# Altium PCB PCB1.PcbDoc
Units mm, origin at the board's own origin, x right, y up, seen from the top; angles counter-clockwise.
Board outline 50.8 x 19 mm, 2 copper layers (Top Layer, Bottom Layer); 27 components, 28 nets, 119 pads, 28 vias.
Unrouted connection lines stored in the file: 1.
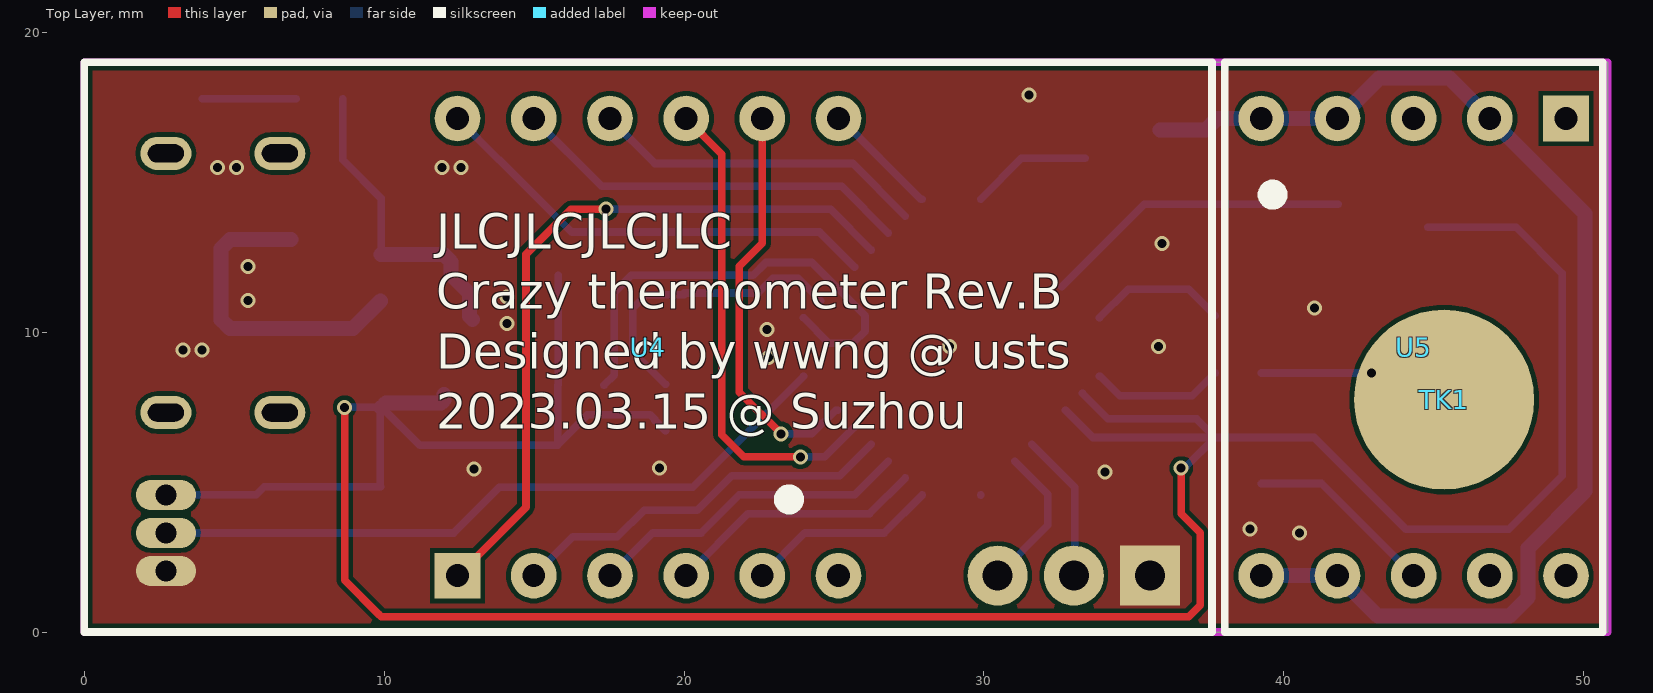
[diagram p0: Top Layer view]
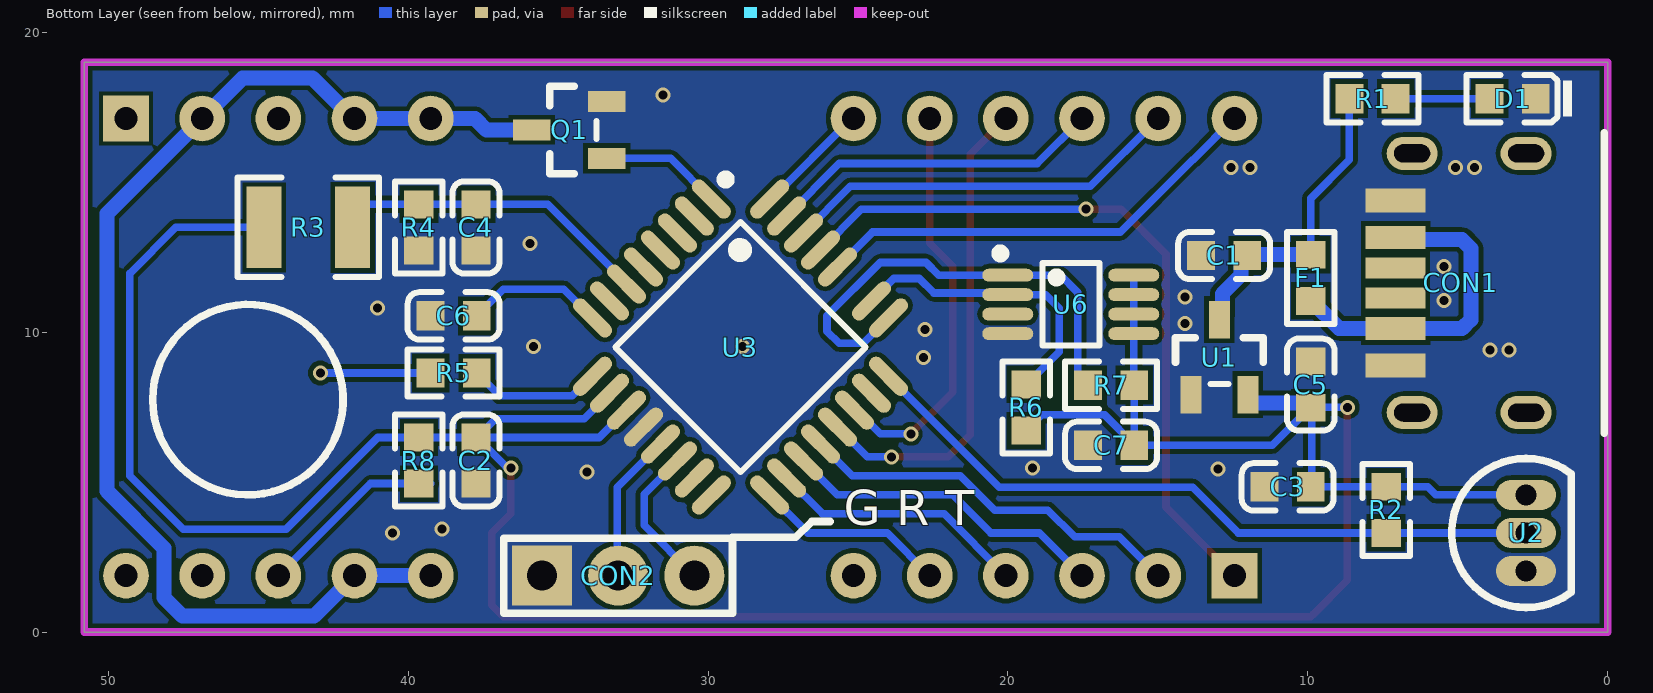
[diagram p1: Bottom Layer view, seen from below]
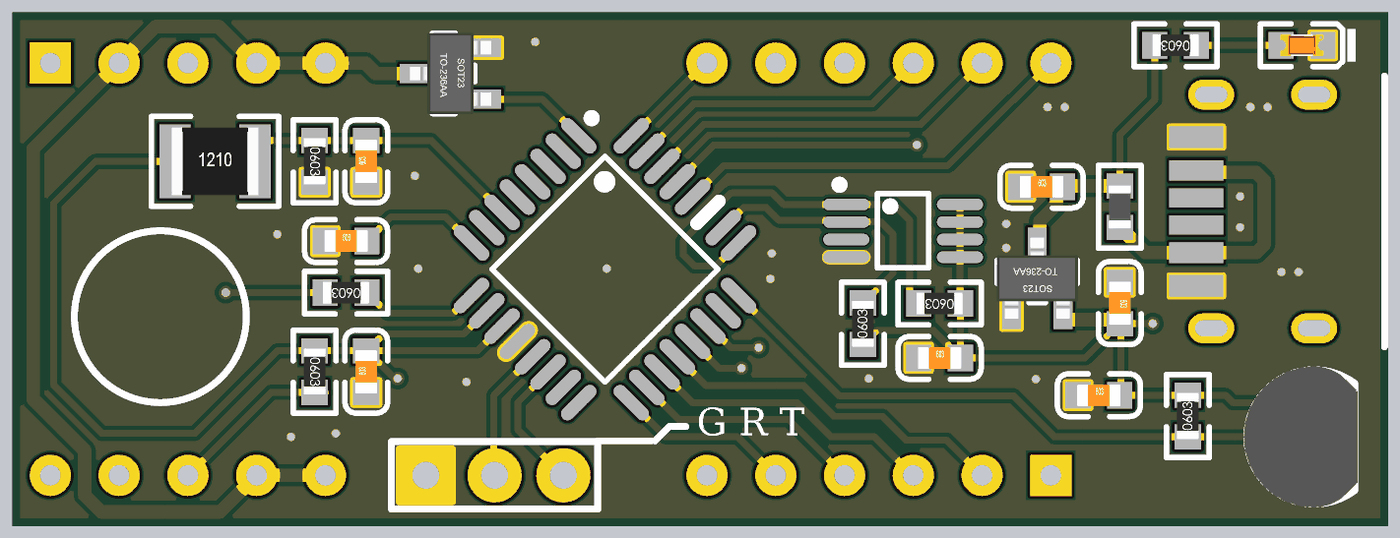
[diagram p2: 3D render of the assembled board from below, using the file's embedded part models]

## Layer stack, top to bottom
Top Solder: solder mask 0.0102, Solder Resist, Dk 3.5
Top Layer: signal copper 0.0356
Dielectric 1: dielectric 0.32, FR-4, Dk 4.8
Bottom Layer: signal copper 0.0356
Bottom Solder: solder mask 0.0102, Solder Resist, Dk 3.5

## Board outline
0,0 0,19 50.8,19 50.8,0

## Design rules (kind name [scope] priority, off if disabled: settings)
Clearance [All] p1: gap=0.152 ignorepadtopadclearanceinfootprint=FALSE
PolygonConnect [All] p1: connectstyle=Direct reliefconductorwidth=0.254 reliefentries=4 polygonreliefangle="90 Angle" airgapwidth=0.254
RoutingVias [All] p1: holewidth=0.711 width=1.27 viastyle="Through Hole" minholewidth=0.711 minwidth=1.27 maxholewidth=0.711 maxwidth=1.27
SolderMaskExpansion [All] p1: expansion=0.102 istentingtop=FALSE
Width [All] p1: maxlimit=1 minlimit=0.152 preferedwidth=0.254
30 further rules are at their usual default settings.

## Classes and differential pairs
component class Sheet1: C1 C2 C3 C4 C5 C6 C7 CON1 CON2 D1 F1 Q1 R4 R5 R6 R7 R8 TK1 U1 U2 U3 U4 U5 U6

## Components (designator, comment, footprint, x,y, rotation, side; value= is the part's Value field where it differs from the comment)
C1 "1uF" 0603_C 12.794,12.553 r180 bottom
C2 "1uF" 0603_C 37.736,5.715 r90 bottom
C3 "0.1uF" 0603_C 10.676,4.842 r180 bottom
C4 "0.1uF" 0603_C 37.736,13.488 r90 bottom
C5 "0.1uF" 0603_C 9.906,8.247 r270 bottom
C6 "0.01uF" 0603_C 38.481,10.541 r180 bottom
C7 "0.1uF" 0603_C 16.561,6.223 r180 bottom
CON1 "USB Type-C" "TYPE-C 6P" 0.127,11.636 r90 bottom
CON2 "HDR1x3" HDR1X3 32.995,1.88 r180 bottom
D1 "LED" 0603_LED_S1 3.175,17.78 r0 bottom
F1 "6V/0.5A" 0603_L 9.906,11.808 r90 bottom
Q1 "AO3416" SOT-23(SOT-23-3) 34.624,16.739 r180 bottom
R1 "10K" 0603_R 7.847,17.78 r0 bottom
R2 "10K" 0603_R 7.391,4.072 r90 bottom
R3 "GT36516" 1210_R 43.324,13.488 r180 bottom
R4 "10K" 0603_R 39.642,13.488 r270 bottom
R5 "1K" 0603_R 38.481,8.636 r0 bottom
R6 "10K" 0603_R 19.396,7.485 r90 bottom
R7 "10K" 0603_R 16.561,8.23 r0 bottom
R8 "1K" 0603_R 39.642,5.715 r270 bottom
TK1 "Touch Key" TOUCHKEYD6 45.339,7.747 r0 top
U1 "SC662K-3.3V" SOT-23(SOT-23-3) 12.954,9.164 r270 bottom
U2 "DS18B20" TO-92(TO-92-3) 2.727,3.302 r90 bottom
U3 "STC8H4K64TL-45I-LQFP32" LQFP-32_7X7X08P 28.917,9.5 r315 bottom
U4 "数码管 3P 共阴" "0.56寸 3位" 18.8,9.5 r0 top locked
U5 "数码管 1P 共阳" "0.56寸 1位" 44.323,9.5 r180 top locked
U6 "LM75BDP" MSOP-8 17.907,10.922 r270 bottom

## Footprints (in the part's own frame and the unit in brackets; to place one, negate y for a bottom-side part, rotate by r counter-clockwise, add the part's x,y. Pads: shape width x height; smd on the part's side, far side on the other; paste and mask are expansions set on the pad)
"0.56寸 1位" [mil] "数码管"
  rect 60x60 hole 30: 1(-200,-300)
  round 60 hole 30: 2(-100,-300) 3(0,300) 3(0,-300) 4(100,-300) 5(200,-300) 6(200,300) 7(100,300) 9(-100,300) 10(-200,300)
  silkscreen extent -248,-374 248,374, body extent -248,-374 248,374, height 315
"0.56寸 3位" [mil] "数码管"
  rect 60x60 hole 30: 1(-250,-300)
  round 60 hole 30: 2(-150,-300) 3(-50,-300) 4(50,-300) 5(150,-300) 6(250,-300) 7(250,300) 8(150,300) 9(50,300) 10(-50,300) 11(-150,300) 12(-250,300)
  silkscreen extent -740,-374 740,374, body extent -744,-374 744,374, height 315
0603_C [mm]
  rect 0.93x0.98 smd: 1(-0.77,0) 2(0.77,0)
  silkscreen extent -1.53,-0.79 1.54,0.79, body extent -0.8,-0.4 0.8,0.4, height 0.3
0603_L [mm]
  rect 0.93x0.98 smd: 1(-0.77,0) 2(0.77,0)
  silkscreen extent -1.53,-0.79 1.54,0.79, body extent -0.8,-0.41 0.8,0.41, height 0.46
0603_LED_S1 [mm]
  rect 0.93x0.98 smd: A(0.77,0) K(-0.77,0)
  silkscreen extent -1.97,-0.79 1.54,0.79, body extent -0.8,-0.4 0.8,0.4, height 0.6
0603_R [mm]
  rect 0.93x0.98 smd: 1(-0.77,0) 2(0.77,0)
  silkscreen extent -1.53,-0.79 1.54,0.79, body extent -0.85,-0.4 0.85,0.4, height 0.56
1210_R [mm]
  rect 1.16x2.72 smd: 1(-1.475,0) 2(1.475,0)
  silkscreen extent -2.35,-1.66 2.36,1.66, body extent -1.6,-1.25 1.6,1.25, height 0.6
HDR1X3 [mm]
  rect 2x2 hole 1: 1(-2.54,0)
  round 2 hole 1: 2(0,0) 3(2.54,0)
  silkscreen extent -3.81,-1.25 3.81,1.25
LQFP-32_7X7X08P [mm]
  oval 0.48x1.65 smd: 1(-2.8,-4.175) 2(-2,-4.175) 3(-1.2,-4.175) 4(-0.4,-4.175) 5(0.4,-4.175) 6(1.2,-4.175) 7(2,-4.175) 8(2.8,-4.175) 17(2.8,4.175) 18(2,4.175) 19(1.2,4.175) 20(0.4,4.175) 21(-0.4,4.175) 22(-1.2,4.175) 23(-2,4.175) 24(-2.8,4.175)
  oval 1.65x0.48 smd: 9(4.175,-2.8) 10(4.175,-2) 11(4.175,-1.2) 12(4.175,-0.4) 13(4.175,0.4) 14(4.175,1.2) 15(4.175,2) 16(4.175,2.8) 25(-4.175,2.8) 26(-4.175,2) 28(-4.175,0.4) 29(-4.175,-0.4) 30(-4.175,-1.2) 31(-4.175,-2) 32(-4.175,-2.8)
  oval 1.65x0.48 on Bottom Overlay: 27(-4.175,1.2)
  silkscreen extent -3.75,-4.45 2.95,2.95
MSOP-8 [mm]
  oval 0.43x1.7 smd mask+0.051: 1(-0.975,-2.1) 2(-0.325,-2.1) 3(0.325,-2.1) 4(0.975,-2.1) 5(0.975,2.1) 6(0.325,2.1) 7(-0.325,2.1) 8(-0.975,2.1)
  silkscreen extent -1.85,-2.5 1.38,0.95
SOT-23(SOT-23-3) [mm]
  rect 1.25x0.7 smd: 1(1.25,-0.95) 2(1.25,0.95) 3(-1.25,0)
  silkscreen extent -0.65,-1.46 0.9,1.46, body extent -1.5,-1.5 1.5,1.5, height 1.3
TO-92(TO-92-3) [mm]
  oval 1x2 hole 0.7 mask+0.051: 1(-1.27,0) 2(0,0) 3(1.27,0)
  silkscreen extent -2.48,-1.5 2.48,2.48, body extent -2.61,-1.6 2.61,2.6, height 8
TOUCHKEYD6 [mm]
  round 6 smd: 1(0,0)
"TYPE-C 6P" [mm]
  oval 1.1x1.7 hole 0.6 slot 1.2 at 90 deg: 0(-4.32,6.4) 0(4.32,6.4) 2(-4.32,2.6) 2(4.32,2.6)
  rect 0.7x2 smd: A5(-0.5,6.95) B5(0.5,6.95)
  rect 0.76x2 smd: A9(1.52,6.95) B9(-1.52,6.95)
  rect 0.8x2 smd: A12(2.75,6.95) B12(-2.75,6.95)
  silkscreen extent -5,0 5,0, body extent -4.47,0 4.47,6.8, height 3.2

## Part data
C1 C2 C3 C4 C5 C6 C7: library part "0603 100nF (104) 10% 50V", "贴片电容", Package=0603, SuppliersPartNumber=C14663, ComponentLink1Description=供应商链接, ComponentLink1URL=http://www.szlcsc.com/product/details_15331.html, Supplier=LC
D1: library part Diode, "二极管", Package=SMA(DO-214AC), SuppliersPartNumber=C95872, ComponentLink1Description=供应商链接, ComponentLink1URL=http://www.szlcsc.com/product/details_2841.html, Notepad="1N4007 4007 编号C2464 已经停售, 使用新物料编号C95872", Supplier=LC
F1 R1 R2 R3 R4 R5 R6 R7 R8: library part RES, "Resistor"
Q1: "N-Channel Power MOSFET", ComponentLink1Description="Manufacturer Link", ComponentLink1URL=http://www.irf.com/, DatasheetVersion=PD-9.390D, LatestRevisionDate=17-Jul-2002, LatestRevisionNote="Re-released for DXP Platform.", Note="Pin 4 not drawn and electrically connected to Pin 2.", PackageDescription="TO, Thru-Hole, Vertical, Heatsink Mounted; 3 In-Line Leads; Pitch 2.54 mm", PackageReference=TO-220AB, PackageVersion=Feb-1997, Published=8-Jun-2000, Publisher="Altium Limited"
U1: library part "AMS1117 3.3V"
U4: library part "数码管 3P"
U5: library part "数码管 1P"

## Via types
v1: diameter 0.5, hole 0.3, Top Layer to Bottom Layer, tented both sides, 28 vias

## Nets (pads, with @x,y where several pads share a name; then routed paths per layer and width w, separated by ;. In a path a pad name is that pad's centre, name@x,y a point inside that pad or via, vN(x,y) a via of type N, cw(c..) or ccw(c..) an arc to the next point about the centre after c; other vN are vias at no path point)
+3.3V: C2.2 C3.2 C5.2 C7.2 R2.2 R3.1 R6.1 R7.1 R8.1 U1.2 U2.3 U3.10 U3.11 U6.5 U6.6 U6.7 U6.8 | length 107
  Top Layer w0.254: v1(8.687,7.493) 8.687,1.727 9.832,0.582 9.906,0.508 36.831,0.509 37.211,0.889 37.211,3.302 36.576,3.937 v1(36.576,5.461)
  Bottom Layer w0.254: U2.3 5.74,4.572 6.01,4.842 R2.2 C3.2@9.873,4.842 ; v1(8.687,7.493) 9.89,7.493 C5.2 9.873,7.444 C3.2@9.873,4.842 ; C3.2@9.881,4.842 C3.2@9.873,4.842 ; C5.2@9.931,7.477 11.185,6.223 C7.2 R7.1 15.807,8.246 U6.5 U6.6 U6.7 U6.8 ; C7.2@15.791,6.248 16.782,7.239 18.873,7.239 19.033,7.078 19.033,7.053 19.371,6.715 R6.1 ; U3.11 33.629,6.485 C2.2@37.711,6.485 ; U3.10 34.134,7.112 37.084,7.112 C2.2@37.711,6.485 ; v1(36.576,5.461) 36.623,5.508 36.734,5.508 C2.2@37.711,6.485 ; R3.1 47.738,13.488 49.276,11.951 49.276,5.207 47.498,3.429 44.069,3.429 41.013,6.485 R8.1 C2.2 C2.2@37.711,6.485
  Bottom Layer w0.5: C5.2 10.068,7.639 11.904,7.639 12.004,7.739 U1.2
+5V: C1.2 F1.2 R1.2 U1.3 | length 10.4
  Bottom Layer w0.254: R1.2 8.617,15.742 9.906,14.453 F1.2 ; C1.2@11.999,12.578 C1.2
  Bottom Layer w0.5: F1.2 C1.2@11.999,12.578 ; C1.2 12.239,12.338 12.239,11.891 12.854,11.276 12.854,10.514 U1.3
COM0: U3.21 U4.9 | length 16.2
  Top Layer w0.254: U4.9 21.26,15.93 21.26,6.579 21.996,5.842 v1(23.876,5.842)
  Bottom Layer w0.254: v1(23.876,5.842) 24.693,5.842 U3.21
COM1: U3.22 U4.8 | length 13.6
  Top Layer w0.254: U4.8@22.61,17.099 22.61,12.958 21.844,12.192 21.844,8.001 v1(23.241,6.604)
  Bottom Layer w0.254: v1(23.241,6.604) 24.263,6.604 25.055,7.396 U3.22
COM7: U3.28 U4.12 | length 15.3
  Bottom Layer w0.254: U4.12 13.822,15.748 13.843,15.748 16.256,13.335 24.516,13.335 U3.28
CPMW: Q1.1 U3.1 | length 4
  Bottom Layer w0.254: U3.1 31.246,15.789 Q1.1
DQ: R2.1 U2.2 U3.24 | length 23.4
  Bottom Layer w0.254: U2.2 R2.1 12.319,3.302 13.843,4.826 20.283,4.826 U3.24
GND: C1.1 C2.1 C3.1 C4.1 C5.1 C6.1 C7.1 CON1.A12 CON1.B12 CON2.1 D1.K Q1.2 R4.2 U1.1 U2.1 U3.12 U6.4
  other v1: 40.513,3.302 38.862,3.429 34.036,5.334 13.005,5.436 19.177,5.461 22.809,9.144 3.302,9.398 3.937,9.398 28.854,9.525 35.814,9.525 22.758,10.084 14.097,10.287 41.021,10.795 5.461,11.049 14.097,11.176 5.461,12.192 35.941,12.954 4.445,15.494 5.08,15.494 11.938,15.494 12.573,15.494 31.496,17.907
GT_ADC: C4.2 R3.2 R4.1 U3.6 | length 10.4
  Bottom Layer w0.254: U3.6@32.595,11.513 35.34,14.258 R4.1 R3.2@41.816,14.258
NetCON1_A9: CON1.A9 CON1.B9 F1.1 | length 10.7
  Bottom Layer w0.254: F1.1@9.881,11.038 F1.1
  Bottom Layer w0.5: CON1.A9@6.905,13.081 4.865,13.081 4.572,12.788 4.572,10.409 4.865,10.116 CON1.B9 8.959,10.116 F1.1@9.881,11.038
NetD1_1: D1.A R1.1 | length 3.1
  Bottom Layer w0.254: D1.A R1.1
NetQ1_3: Q1.3 U5.2 U5.4 U5.5 U5.6 U5.7 | length 39.9
  Bottom Layer w0.5: Q1.3 37.389,16.739 37.77,17.12 U5.5@39.091,17.12 ; U5.6 U5.7 43.134,0.529 47.519,0.529 48.133,1.143 48.133,2.794 50.038,4.699 50.038,13.945 U5.2 45.512,18.471 43.184,18.471 41.833,17.12 U5.4 U5.5
NetR5_2: R5.2 TK1.1 | length 3.7
  Bottom Layer w0.254: R5.2 v1(42.926,8.636)
NetR8_2: R8.2 U5.3 | length 6.4
  Bottom Layer w0.254: R8.2@39.243,4.945 39.251,4.953 41.25,4.953 U5.3@44.323,1.88
SCL: R6.2 U3.26 U6.2 | length 10
  Bottom Layer w0.254: R6.2 19.371,8.255 18.288,9.339 18.288,10.795 18.74,11.247 U6.2 ; U6.2@20.007,11.303 22.479,11.303 22.962,11.786 23.803,11.786 U3.26
SDA: R7.2 U3.25 U6.1 | length 15.8
  Bottom Layer w0.254: R7.2 17.669,8.568 17.669,11.319 18.247,11.897 U6.1 22.311,11.897 22.733,12.319 24.257,12.319 26.035,10.541 26.035,10.033 25.629,9.627 24.831,9.627 U3.25
SEG8: U3.29 U4.1 | length 24.4
  Top Layer w0.254: U4.1 13.085,2.515 14.732,4.162 14.732,12.598 16.231,14.097 v1(17.399,14.097)
  Bottom Layer w0.254: v1(17.399,14.097) 24.886,14.097 U3.29
SEG9: U3.30 U4.11 | length 13.4
  Bottom Layer w0.254: U4.11 17.251,14.859 25.255,14.859 U3.30
SEG10: U3.31 U4.10 | length 11.2
  Bottom Layer w0.254: U4.10 19.029,15.621 25.625,15.621 U3.31
SEG11: U3.32 U4.7 | length 4.1
  Bottom Layer w0.254: U4.7@25.269,17.001 U4.7 25.203,17.12 27.891,14.432 U3.32
SEG12: U3.17 U4.5 | length 6.4
  Bottom Layer w0.254: U4.5 24.032,3.302 26.679,3.302 U3.17
SEG13: U3.18 U4.4 | length 8.7
  Bottom Layer w0.254: U4.4 22.127,3.937 26.183,3.937 U3.18
SEG14: U3.19 U4.3 | length 10.9
  Bottom Layer w0.254: U4.3 18.952,3.302 20.574,3.302 21.844,4.572 25.686,4.572 U3.19
SEG15: U3.20 U4.2 | length 13.1
  Bottom Layer w0.254: U4.2 16.285,3.175 17.78,3.175 18.669,4.064 20.447,4.064 21.59,5.207 25.19,5.207 U3.20
STC_RXD: CON2.2 U3.13 | length 5
  Bottom Layer w0.254: U3.13 33.02,4.831 CON2.2@33.02,1.905
STC_TXD: CON2.3 U3.14 | length 5
  Bottom Layer w0.254: CON2.3 32.131,3.556 32.131,4.589 U3.14
TCap: C6.2 U3.8 | length 4.6
  Bottom Layer w0.254: U3.8 34.807,11.43 36.822,11.43 C6.2
TK: R5.1 U3.9 | length 4.4
  Bottom Layer w0.254: U3.9 33.871,8.528 34.525,7.874 36.949,7.874 R5.1
pads on no net: CON1.0 CON1.2 CON1.A5 CON1.B5 U3.2 U3.3 U3.4 U3.5 U3.7 U3.15 U3.16 U3.23 U3.27 U4.6 U5.1 U5.9 U5.10 U6.3
copper on no net: | length 0

## Polygon pours and split planes (outlines as drawn)
GND on Top Layer "GND_L01_P000" (solid, pour order 0): 0,19.101 0.127,18.974 50.749,18.974 50.749,0.229 50.521,0 0,0
GND on Bottom Layer "GND_L02_P001" (solid, pour order 1): 0,19.05 50.698,19.05 50.749,18.999 50.724,18.974 50.724,0 0.025,0

## Keep-outs
Keep-Out Layer:
  the board outline again, w0.254

## Silkscreen, mask and mechanical layers (free items; w line width, h text height)
Top Overlay:
  text "JLCJLCJLCJLC / Crazy thermometer Rev.B / Designed by wwng @ usts / 2023.03.15 @ Suzhou" at 11.735,6.401 h2
Bottom Overlay:
  lines w0.254: 25.933,3.683 26.543,3.683 27.071,3.155 29.185,3.155
  text "G R T" at 25.482,3.175 h2